# Altium PCB PCB1.PcbDoc
Units mil, origin at the board's own origin, x right, y up, seen from the top; angles counter-clockwise.
Board outline 2140 x 2435 mil, 2 copper layers (Top Layer, Bottom Layer); 10 components, 6 nets, 26 pads, 0 vias.
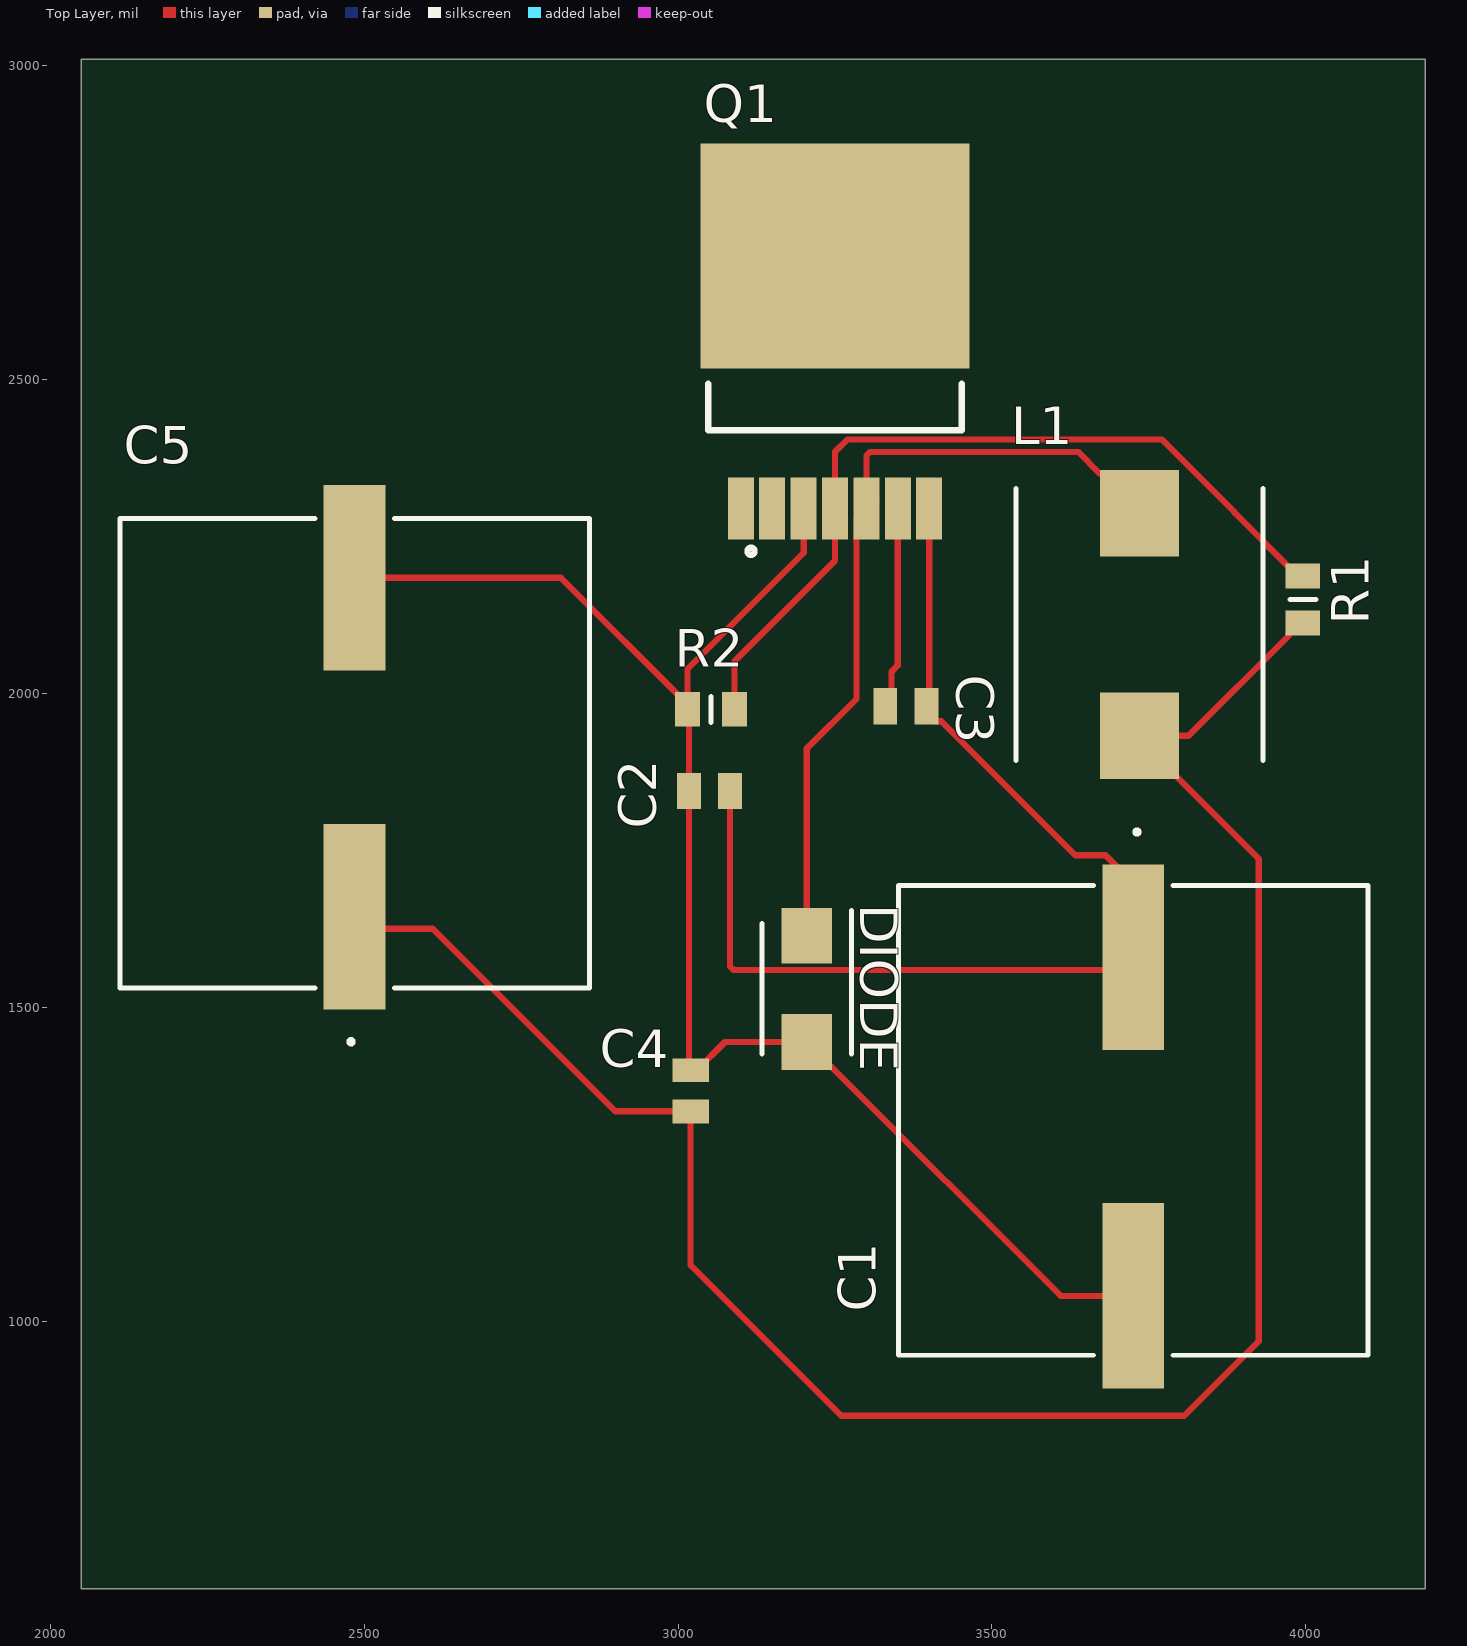
[diagram p0: Top Layer view]
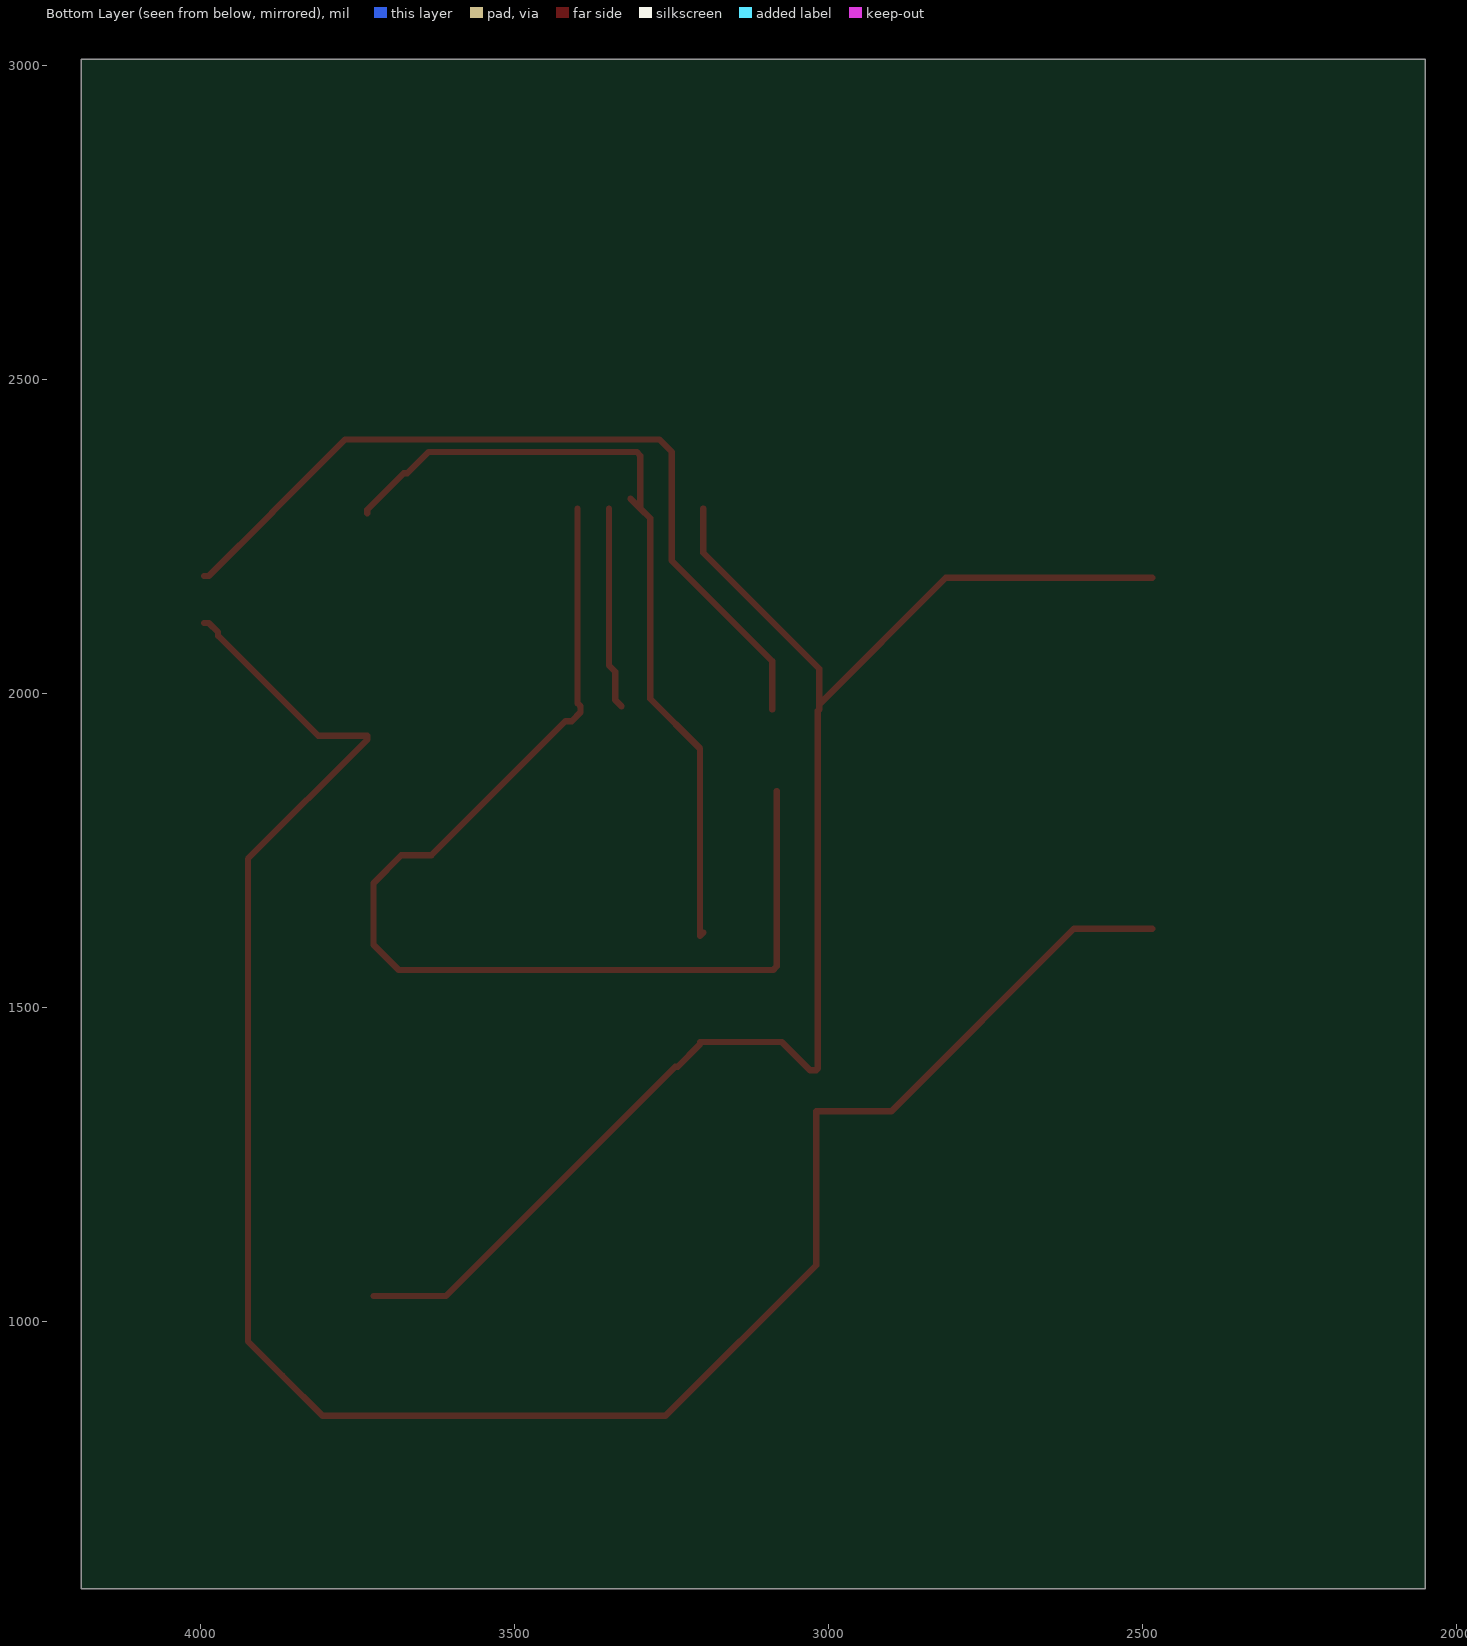
[diagram p1: Bottom Layer view, seen from below]
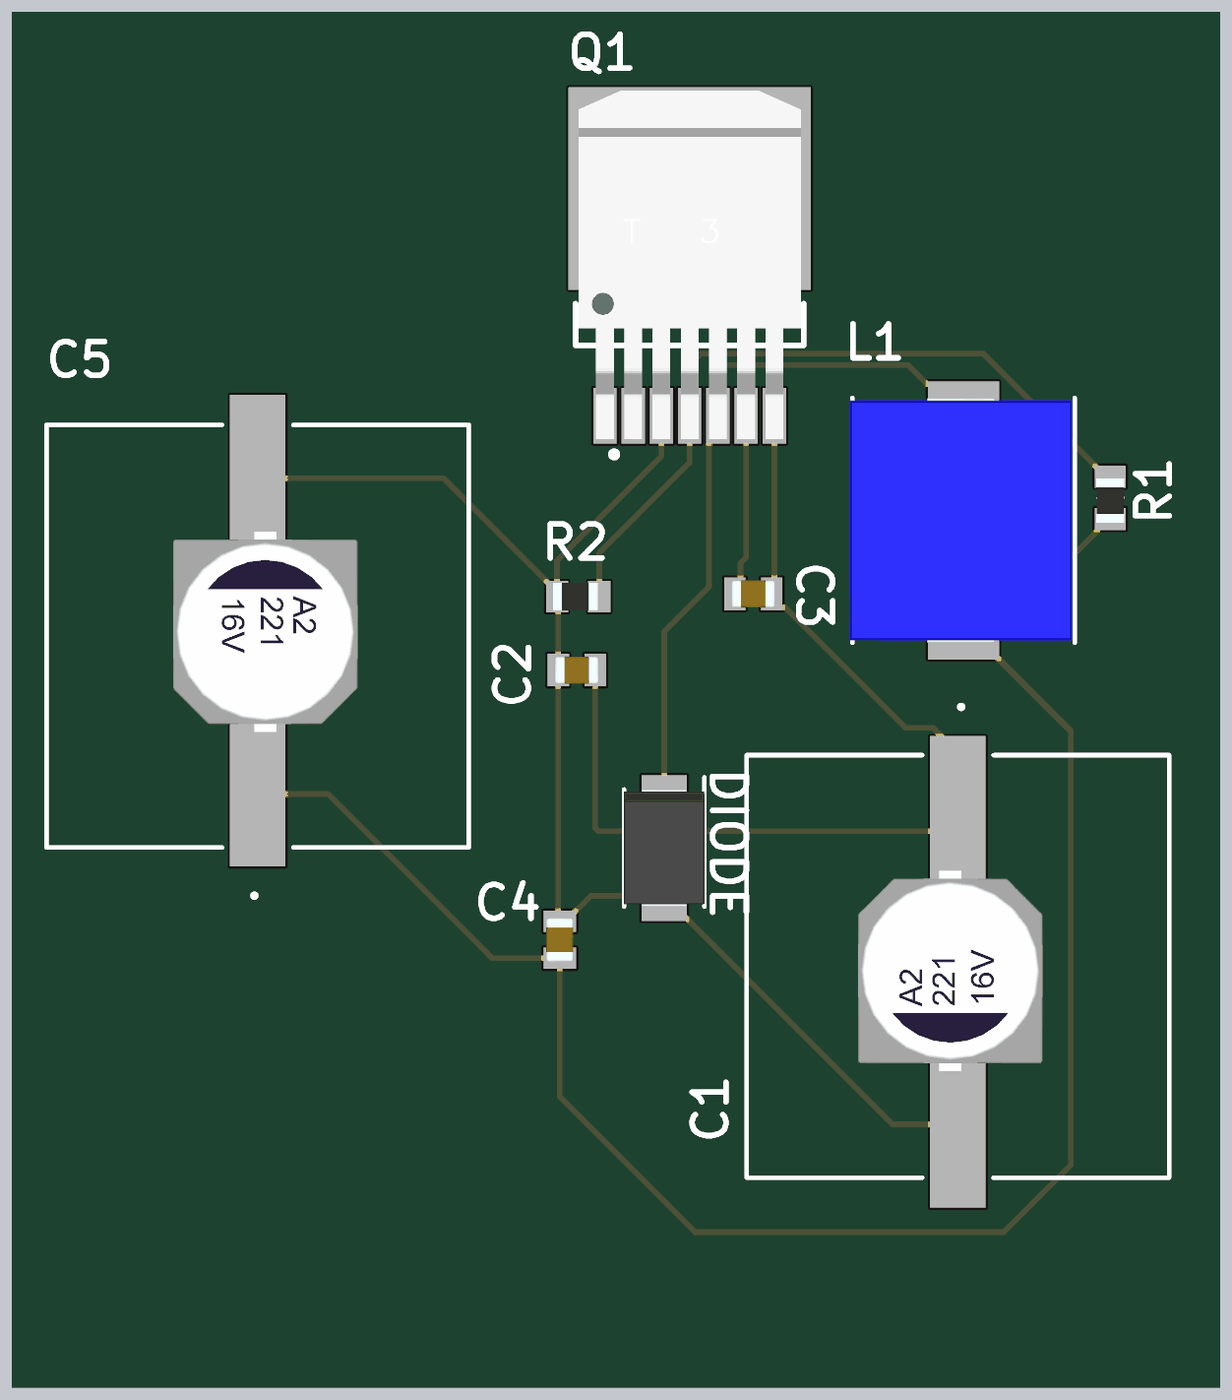
[diagram p2: 3D render of the assembled board from above, using the file's embedded part models]

## Layer stack, top to bottom
Top Solder: solder mask 0.4, Solder Resist, Dk 3.5
Top Layer: signal copper 1.4
Dielectric 1: dielectric 12.6, FR-4, Dk 4.8
Bottom Layer: signal copper 1.4
Bottom Solder: solder mask 0.4, Solder Resist, Dk 3.5

## Board outline
2050,575 4190,575 4190,3010 2050,3010

## Design rules (kind name [scope] priority, off if disabled: settings)
Clearance [All] p1: gap=3.94 ignorepadtopadclearanceinfootprint=FALSE
PolygonConnect [All] p1: connectstyle=Relief reliefconductorwidth=10 reliefentries=4 polygonreliefangle="90 Angle" airgapwidth=10
RoutingVias [All] p1: holewidth=28 width=50 viastyle="Through Hole" minholewidth=28 minwidth=50 maxholewidth=28 maxwidth=50
SolderMaskExpansion [All] p1: expansion=4 istentingtop=FALSE
Width [All] p1: maxlimit=10 minlimit=10 preferedwidth=10
30 further rules are at their usual default settings.

## Components (designator, comment, footprint, x,y, rotation, side; value= is the part's Value field where it differs from the comment)
C1 "220uF" FKV(K16) 3725,1320.47 r270 top
C2 "1uF" CAPC2012X145N 3050,1845 r0 top
C3 "1uF" CAPC2012X145N 3362.68,1980 r180 top
C4 "1uF" CAPC2012X145N 3020,1367.68 r270 top
C5 "220uF" FKV(K16) 2485,1905 r90 top
DIODE "1N0" DIOM5336X244N 3205,1530 r270 top
L1 "47uH" INDPM110100X400N 3735,2110 r270 top
Q1 "XL4014" TO-263-5 3250,2780 r0 top
R1 "10k" RESC2012X65N 3995,2150 r90 top
R2 "3.3k" RESC2012X65N 3052.6,1975 r0 top

## Footprints (in the part's own frame and the unit in brackets; to place one, negate y for a bottom-side part, rotate by r counter-clockwise, add the part's x,y. Pads: shape width x height; smd on the part's side, far side on the other; paste and mask are expansions set on the pad)
CAPC2012X145N [mm]
  rect 0.97x1.47 smd: 1(-0.83,0) 2(0.83,0)
  body extent -1,-0.63 1,0.62, height 1.45
DIOM5336X244N [mm]
  rect 2.25x2.05 smd: 1(-2.15,0) 2(2.15,0)
  silkscreen extent -3.18,-1.81 2.64,1.81, body extent -2.64,-1.81 2.64,1.81, height 2.44
FKV(K16) [mm]
  rect 7.5x2.5 smd: 1(-6.604,0) 2(7.1,0)
  silkscreen extent -11.75,-9.5 9.5,9.5, body extent -4.3,-4.49 4.7,3.81, height 11.24
INDPM110100X400N [mm]
  rect 3.5x3.2 smd: 1(-4.5,0) 2(4.5,0)
  silkscreen extent -5.5,-5 5.5,5, body extent -5.5,-5.13 5.5,4.87, height 4
RESC2012X65N [mm]
  rect 1x1.4 smd: 1(-0.95,0) 2(0.95,0)
  silkscreen extent 0,-0.53 0,0.53, body extent -1.13,-0.62 0.87,0.62, height 0.65
TO-263-5 [mm]
  rect 1.05x2.5 smd: 0(-2.54,-12.319) 1(-1.27,-12.319) 2(0,-12.319) 3(1.27,-12.319) 4(2.54,-12.319) 5(3.81,-12.319) 10(-3.81,-12.319)
  rect 10.9x9.1 smd: 6(0,-2.1)
  silkscreen extent -5.13,-14.19 5.13,-7.28, body extent -5,-13.37 5,2.3, height 4.81

## Part data
C1 C5: library part EEVFK2A221M, "Ecap 220uF 100V K16 case Panasonic Aluminium Electrolytic Capacitor 220F 100 V dc 18mm Surface Mount series FK SMD lifetime 5000h", Manufacturer_Name=Panasonic, RS Part Number=5370679, Allied Price/Stock=https://www.alliedelec.com/panasonic-eev-fk2a221m/70257853/, Allied_Number=70257853, Arrow Part Number=EEVFK2A221M, Arrow Price/Stock=https://www.arrow.com/en/products/eevfk2a221m/panasonic, Datasheet Link=http://uk.rs-online.com/web/p/products/5370679, Manufacturer_Part_Number=EEVFK2A221M, RS Price/Stock=http://uk.rs-online.com/web/p/products/5370679
C2 C3 C4: library part GRM21BR71H104JA01L, "Multilayer Ceramic Capacitors MLCC - SMD/SMT 0805 0.1uF 50volts X7R 5%", Manufacturer_Name="Murata Electronics", Arrow Part Number=GRM21BR71H104JA01L, Arrow Price/Stock=https://www.arrow.com/en/products/grm21br71h104ja01l/murata-manufacturing, Datasheet Link=http://www.murata.com/~/media/webrenewal/support/library/catalog/products/capacitor/mlcc/c02e.pdf, Geometry.Height=1.45mm, Manufacturer_Part_Number=GRM21BR71H104JA01L
DIODE: library part SS54B, "HY Electronic Corp SS54B, SMT Rectifier Schottky Diode, 40V 5A, 2-Pin SMB", Manufacturer_Name="HY Electronic Corp", RS Part Number=1711461, Arrow Part Number=SS54B, Arrow Price/Stock=http://uk.rs-online.com/web/p/products/1711461, Datasheet Link=http://docs-europe.electrocomponents.com/webdocs/14bb/0900766b814bbf92.pdf, Geometry.Height=2.44mm, Manufacturer_Part_Number=SS54B, RS Price/Stock=http://uk.rs-online.com/web/p/products/1711461
L1: library part SRP1038A-470M, "Inductor SMD shielded AEC-Q200 47uH Bourns SRP1038A Series Shielded Wire-wound SMD Inductor with a Carbonyl Powder Core, 47 H 20% 3A Idc", Manufacturer_Name=Bourns, RS Part Number=1728637, Allied Price/Stock=https://www.alliedelec.com/bourns-srp1038a-470m/70377524/, Allied_Number=70377524, Arrow Part Number=SRP1038A-470M, Arrow Price/Stock=https://www.arrow.com/en/products/srp1038a-470m/bourns, Datasheet Link=http://uk.rs-online.com/web/p/products/8193337, Geometry.Height=4mm, Manufacturer_Part_Number=SRP1038A-470M, RS Price/Stock=http://uk.rs-online.com/web/p/products/1728637
Q1: library part AP1506-50K5G-13, "DC / DC converters in the housing TO263-5L, Voltage Regulator, Buck Converter, Switching Regulator", Manufacturer_Name="Diodes Inc.", Arrow Part Number=AP1506-50K5G-13, Arrow Price/Stock=https://www.arrow.com/en/products/ap1506-50k5g-13/diodes-incorporated, Datasheet Link=https://www.diodes.com/assets/Datasheets/AP1506.pdf, Manufacturer_Part_Number=AP1506-50K5G-13
R1 R2: library part KTR10EZPF5103, "Thick Film Resistors - SMD 0805 510Kohm 1% High VoltageAEC-Q200", Manufacturer_Name="ROHM Semiconductor", Arrow Part Number=KTR10EZPF5103, Arrow Price/Stock=https://www.arrow.com/en/products/ktr10ezpf5103/rohm-semiconductor, Datasheet Link=http://rohmfs.rohm.com/en/products/databook/datasheet/passive/resistor/chip_resistor/ktr.pdf, Geometry.Height=0.65mm, Manufacturer_Part_Number=KTR10EZPF5103

## Nets (pads, with @x,y where several pads share a name; then routed paths per layer and width w, separated by ;. In a path a pad name is that pad's centre, name@x,y a point inside that pad or via, vN(x,y) a via of type N, cw(c..) or ccw(c..) an arc to the next point about the centre after c; other vN are vias at no path point)
GND: C1.2 C2.1 C4.1 C5.2 DIODE.2 Q1.1 R2.1 | length 2480.4
  Top Layer w10: C5.2 2813.54,2184.53 R2.1@3015.2,1982.87 ; Q1.1 3200,2224.41 3015.2,2039.61 R2.1@3015.2,1982.87 ; C1.2 3609.41,1040.94 3244.29,1406.06 3240.35,1406.06 3205,1441.42 DIODE.2 3074.84,1445.35 3029.84,1400.35 C4.1 3017.32,1403.03 C2.1 3017.32,1972.87 R2.1 R2.1@3015.2,1982.87
NetC1_1: C1.1 C2.2 C3.1 Q1.5 | length 1807.9
  Top Layer w10: C2.2 3082.68,1565.86 3088.54,1560 3685,1560 3725,1600 3725,1698.43 3680.79,1742.64 3632.72,1742.64 3419.29,1956.06 3409.45,1956.06 3395.35,1970.16 C3.1 3400,1984.65 Q1.5
NetC3_2: C3.2 Q1.4 | length 323.3
  Top Layer w10: C3.2 3340,1990 3340,2035 3350,2045 Q1.4
NetC4_2: C4.2 C5.1 L1.2 R1.1 | length 3334.4
  Top Layer w10: C5.1@2485,1625.47 2609.53,1625.47 2900,1335 C4.2 3020,1090 3260,850 3806.21,850 3870,913.79 3925,968.79 3925,1736.93 3735,1926.93 L1.2 3812.99,1932.83 3972.44,2092.28 3972.44,2097.91 3987.13,2112.6 R1.1
NetDIODE_1: DIODE.1 L1.1 Q1.3 | length 1314.5
  Top Layer w10: DIODE.1@3200,1619.65 DIODE.1 3205,1912.7 3284.33,1992.03 3284.33,2279.33 Q1.3 ; Q1.3@3315.67,2310.67 Q1.3 ; L1.1 3735,2293.07 3677.01,2351.06 3671.1,2351.06 3637.17,2385 3305.86,2385 3300,2379.14 Q1.3
NetQ1_2: Q1.2 R1.2 R2.2 | length 1320.1
  Top Layer w10: R2.2 3090,2052.01 3250,2212.01 3250,2385 3270,2405 3770.27,2405 3886.35,2288.91 3886.35,2288.17 3987.13,2187.4 R1.2
pads on no net: Q1.0 Q1.6 Q1.10